# Altium PCB Biocoin_Motherboard.PcbDoc
Units mil, origin at the board's own origin, x right, y up, seen from the top; angles counter-clockwise.
Board outline 2100 x 2600 mil, 4 copper layers (Top Layer, GND, POWER, Bottom Layer), stack 63.78 mil thick; 71 components, 57 nets, 231 pads, 44 vias.
Unrouted connection lines stored in the file: 17.
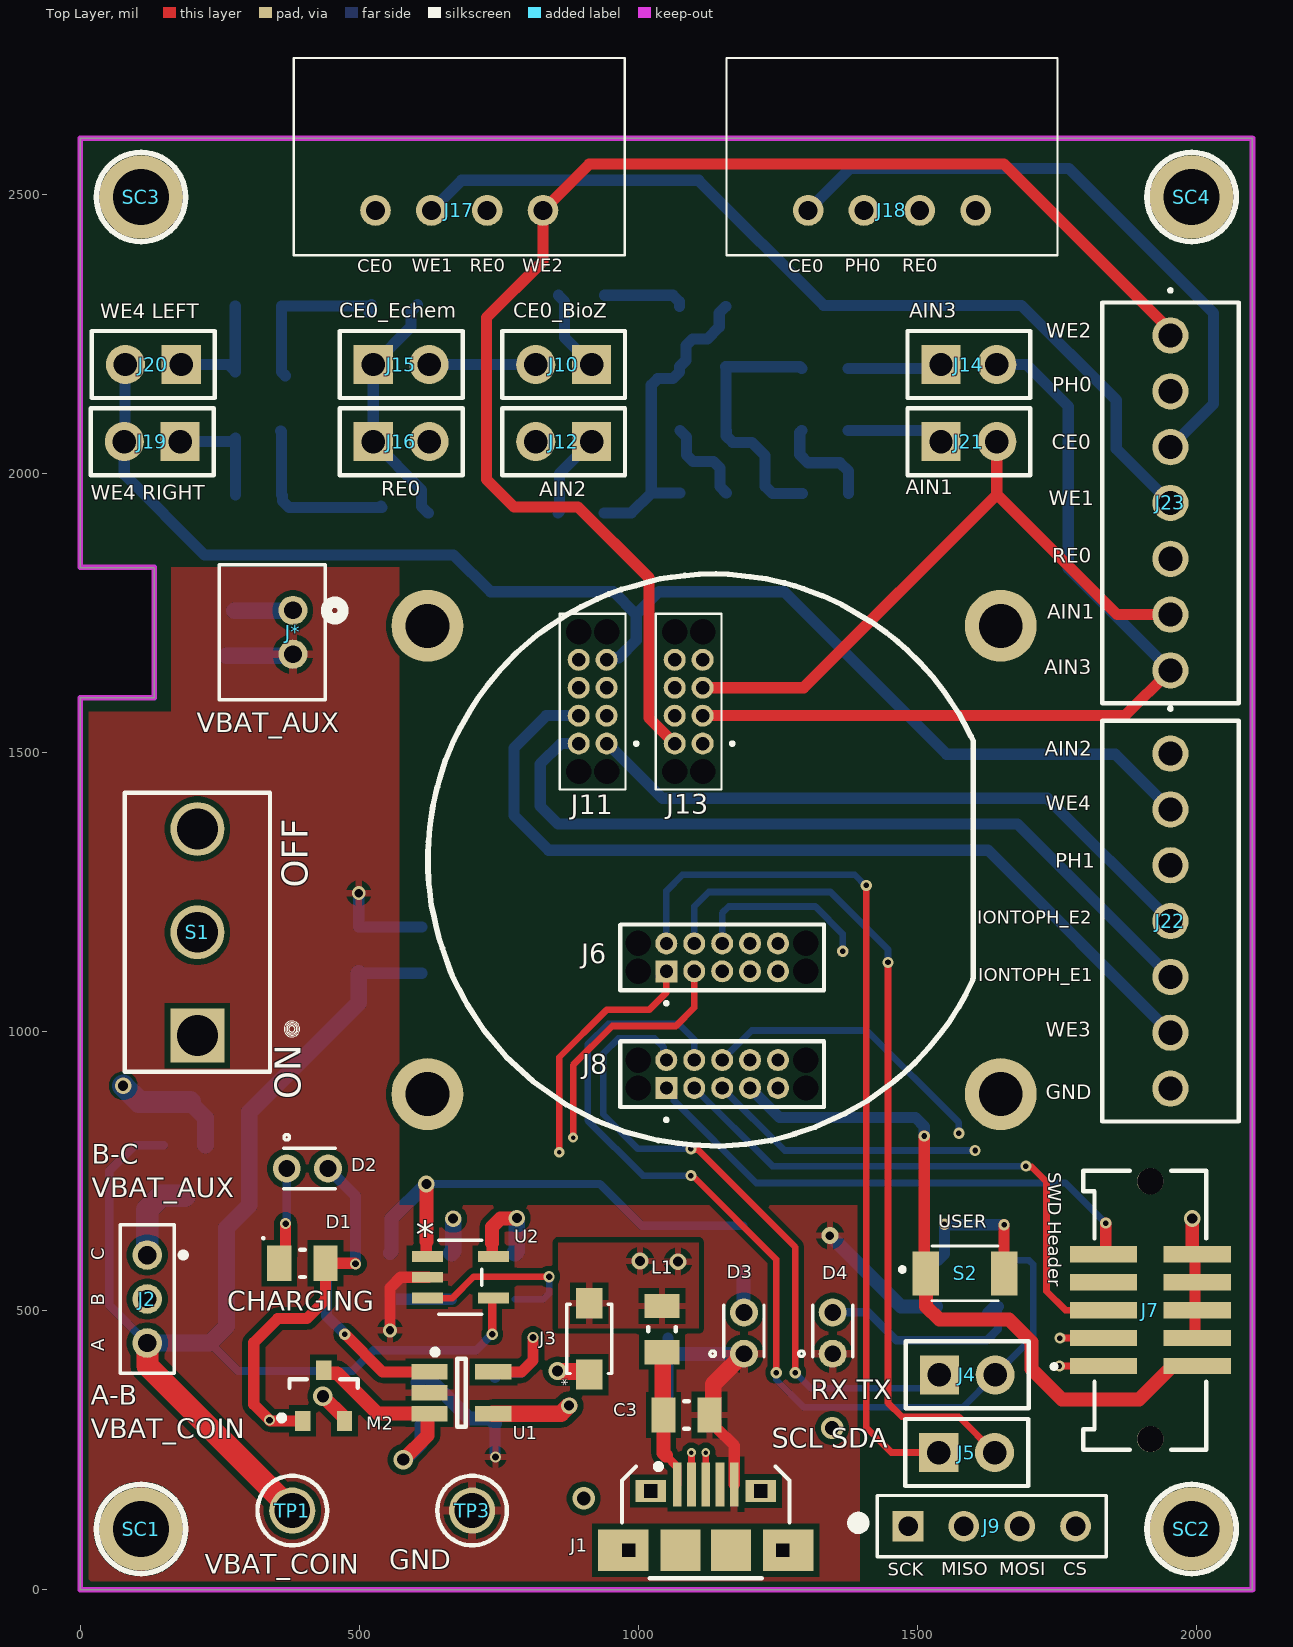
[diagram p0: Top Layer view]
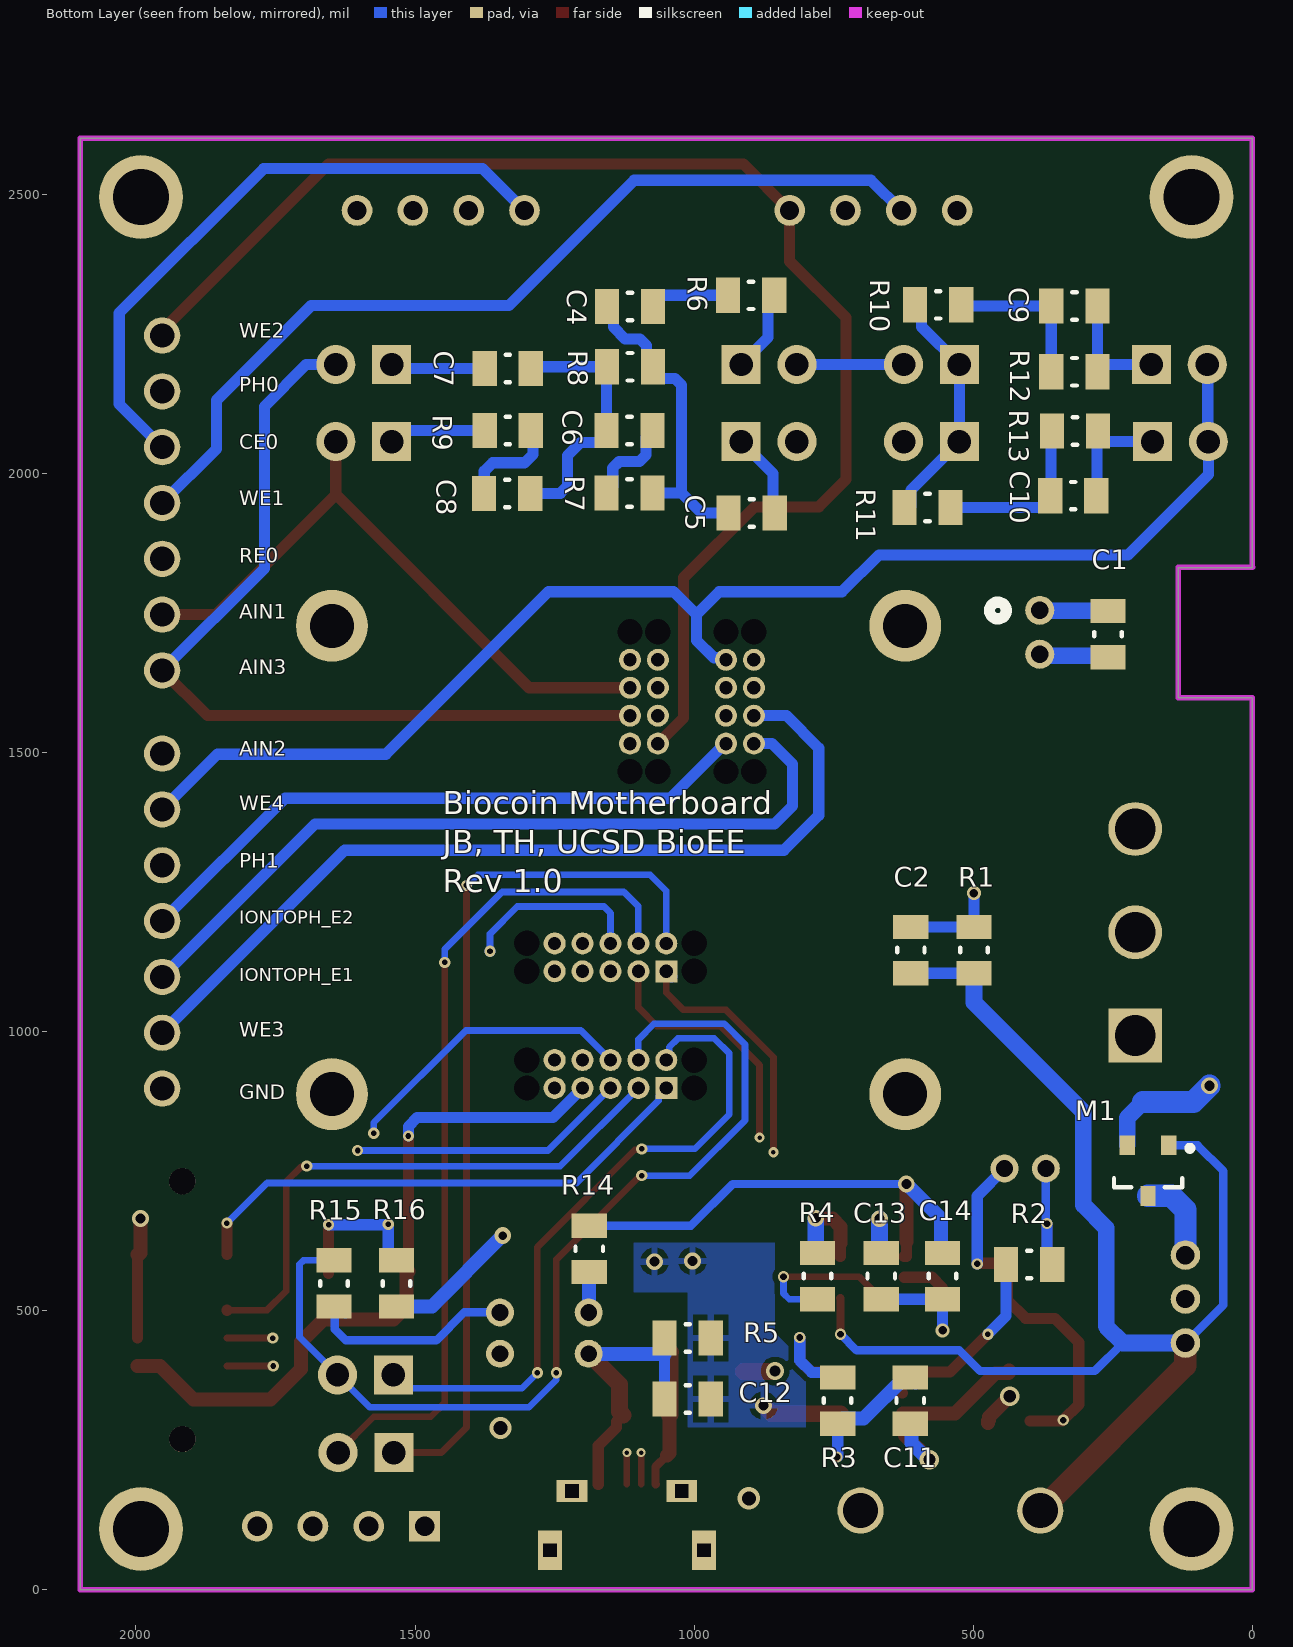
[diagram p1: Bottom Layer view, seen from below]
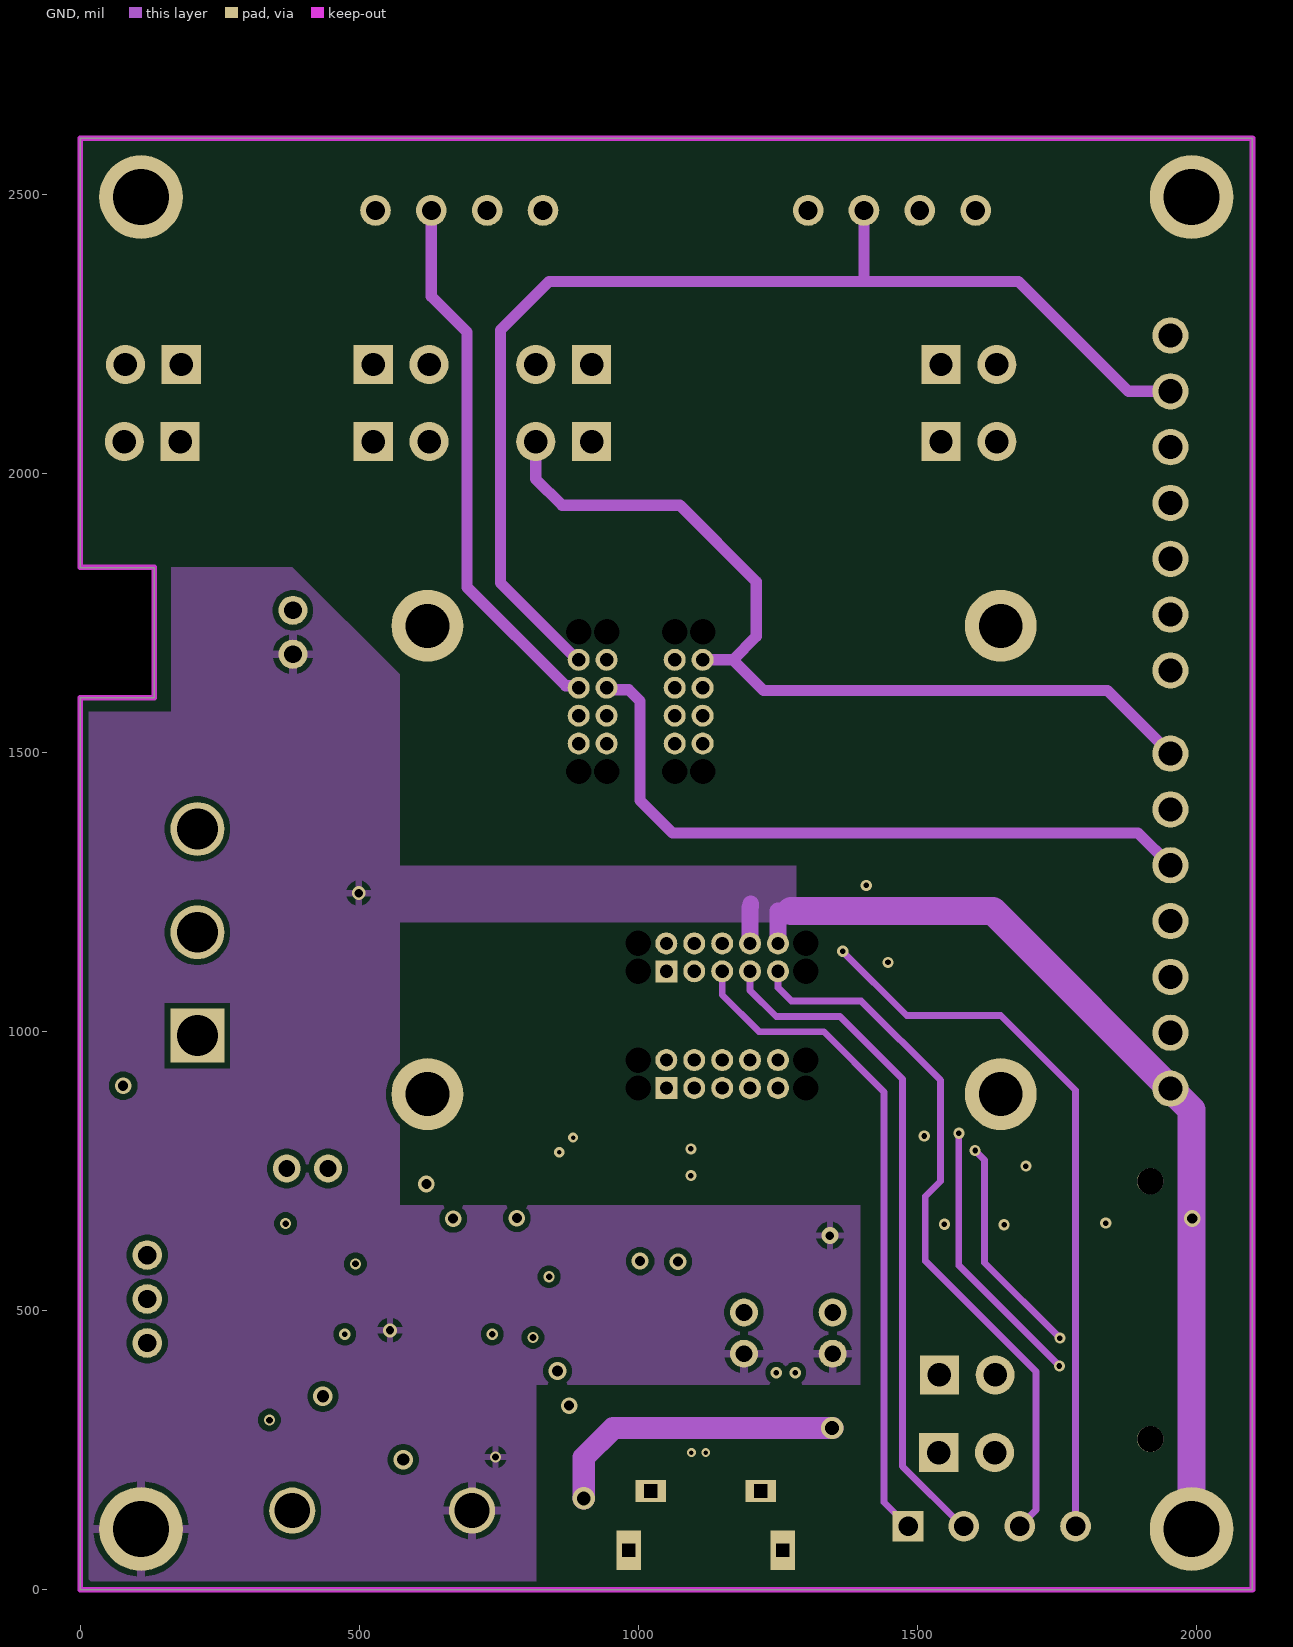
[diagram p2: GND]
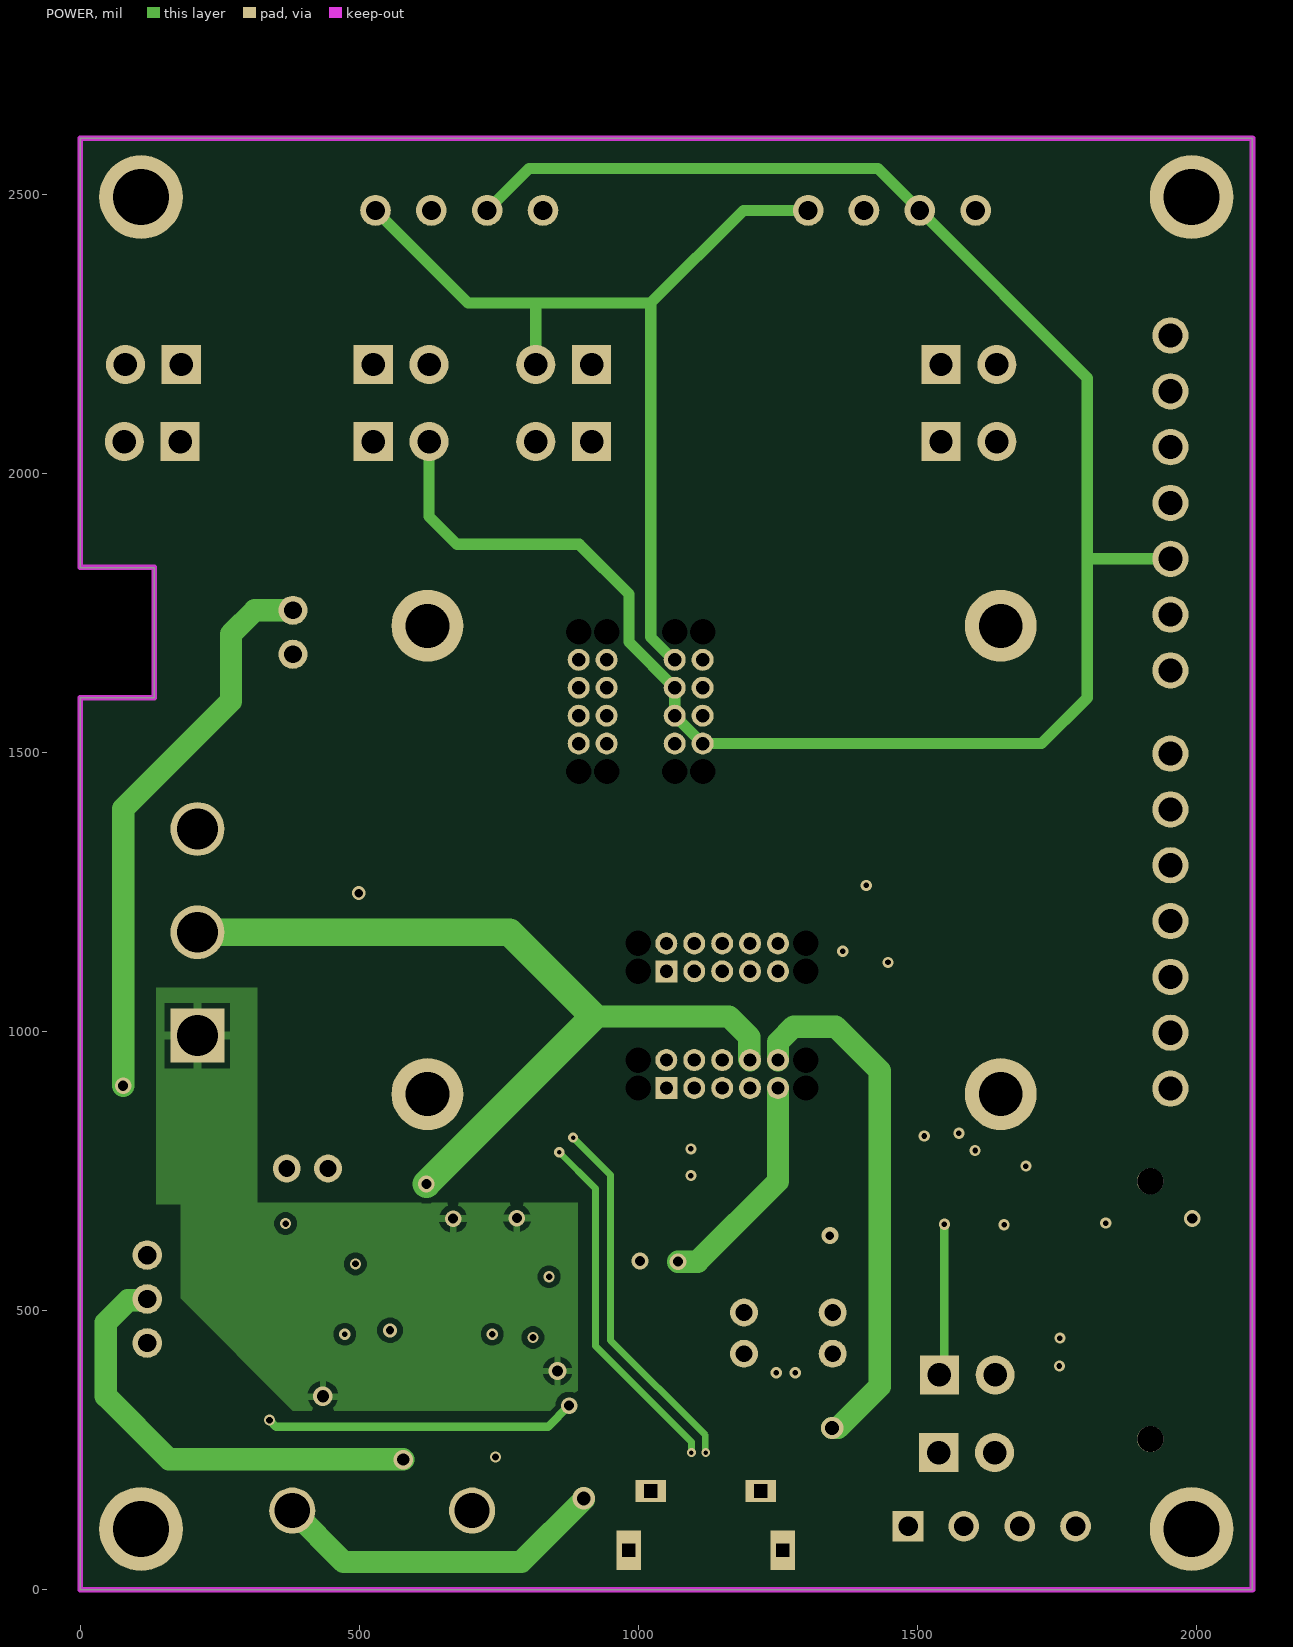
[diagram p3: POWER]
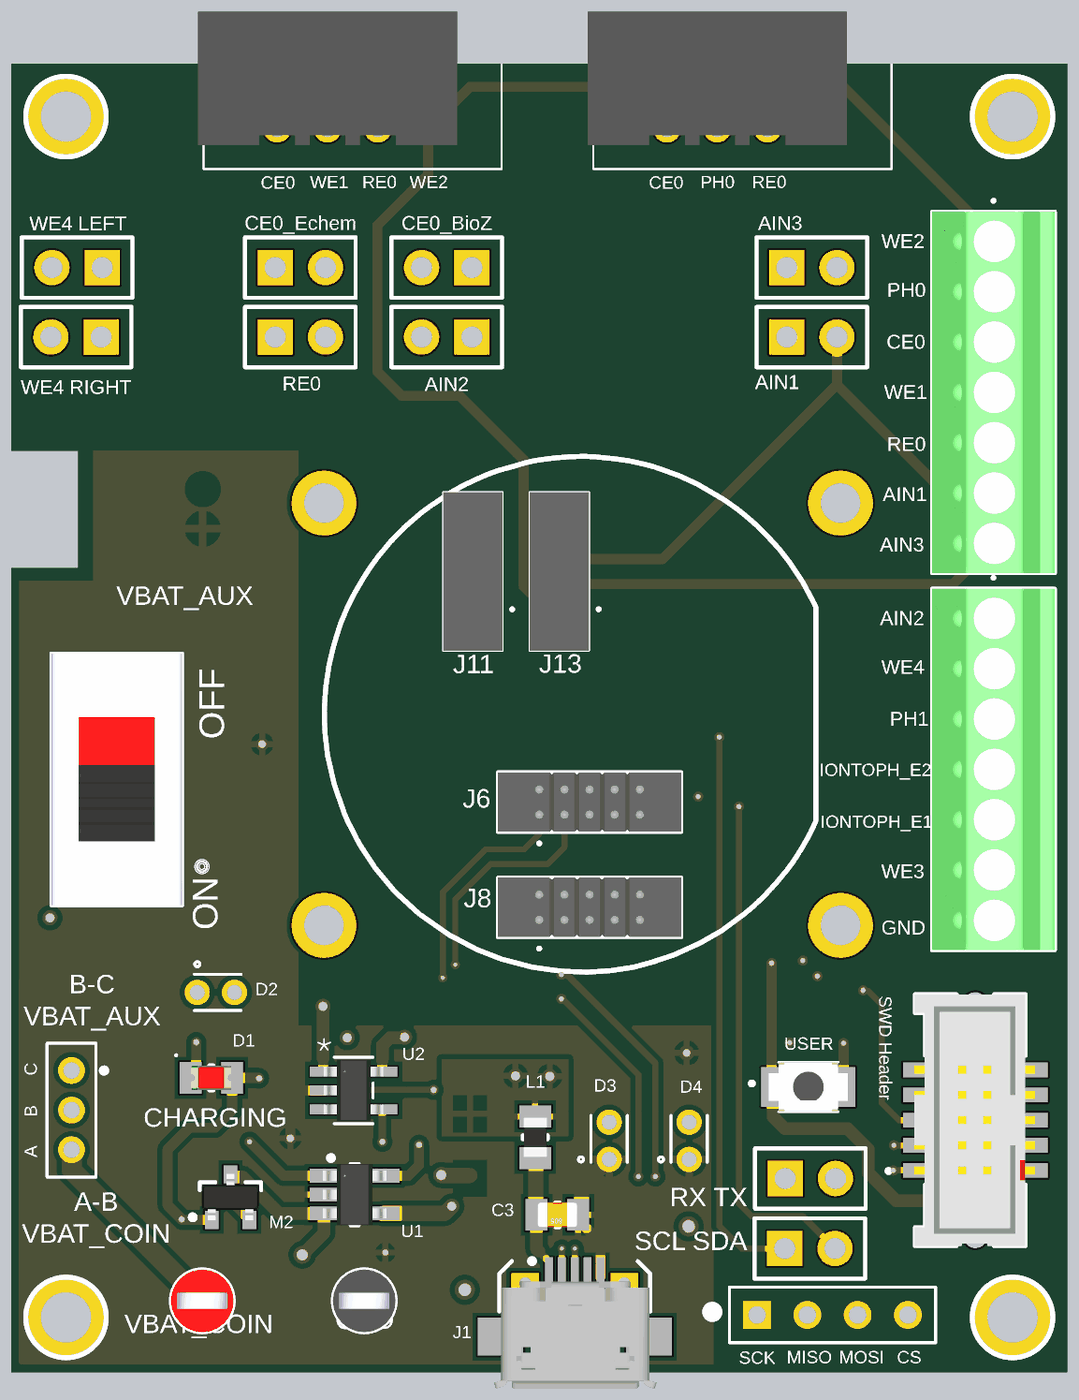
[diagram p4: 3D render of the assembled board from above, using the file's embedded part models]
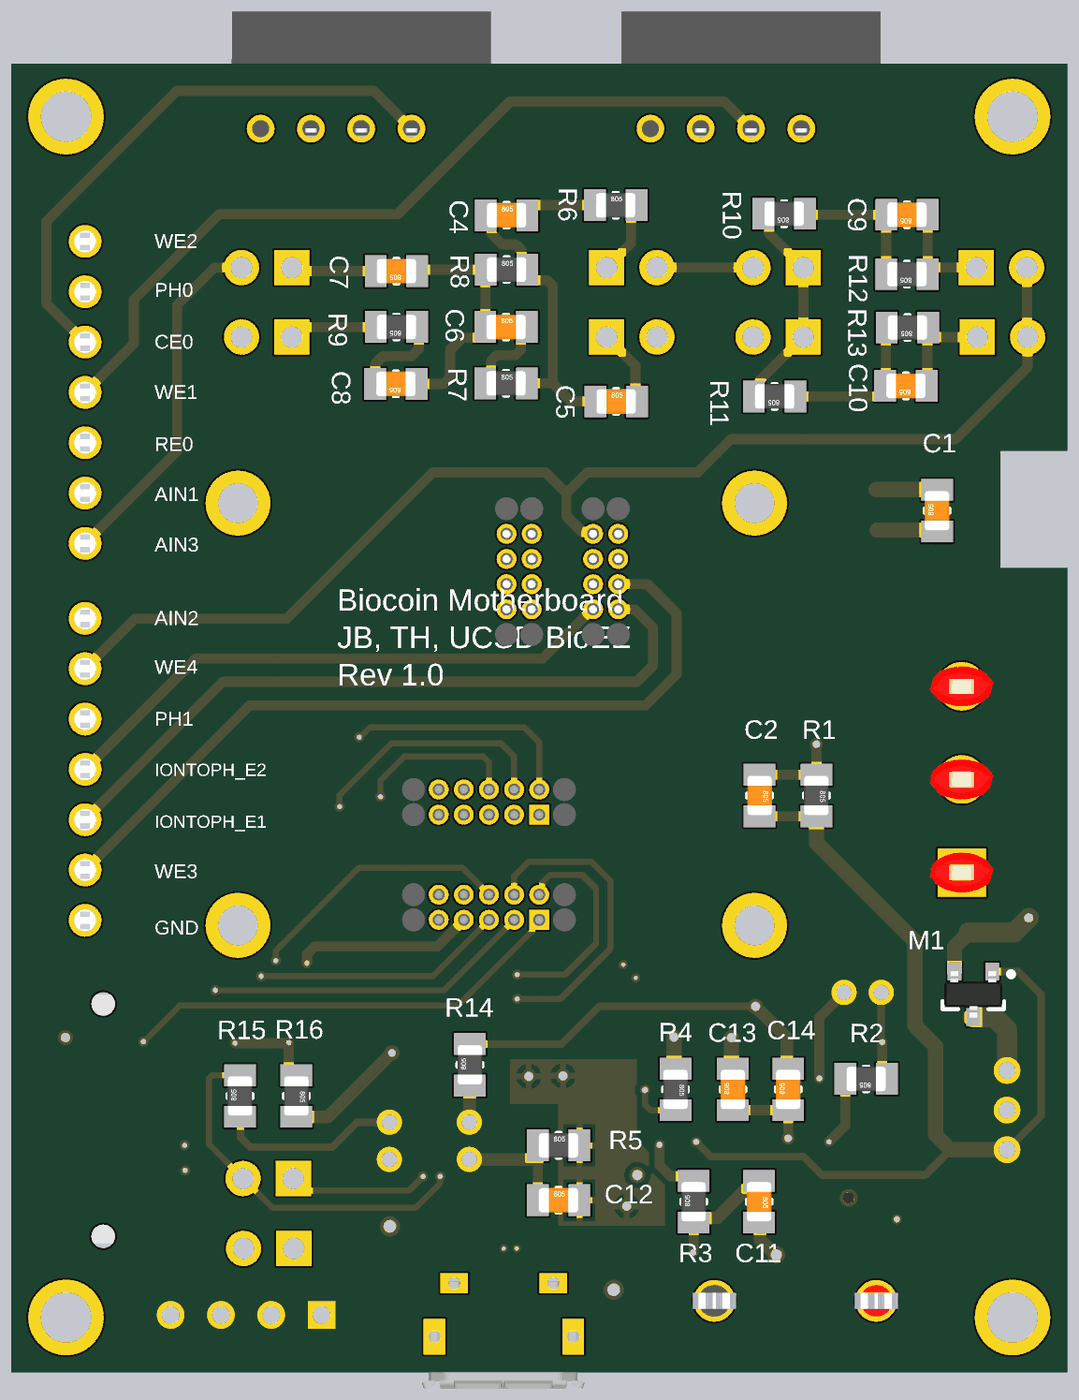
[diagram p5: 3D render of the assembled board from below, using the file's embedded part models]

## Layer stack, top to bottom
Top Solder: solder mask 0.4, Solder Resist, Dk 3.5
Top Layer: signal copper 1.378
Dielectric 2: prepreg 6.89, PP-006, Dk 4.2
GND: signal copper 1.378
Dielectric 1: dielectric 44.488, FR-4, Dk 4.2
POWER: signal copper 1.378
Dielectric 3: prepreg 6.89, PP-006, Dk 4.2
Bottom Layer: signal copper 1.378
Bottom Solder: solder mask 0.4, Solder Resist, Dk 3.5

## Board outline
0,1831 133,1831 133,1598 0,1598 0,0 2100,0 2100,2600 0,2600

## Design rules (kind name [scope] priority, off if disabled: settings)
Clearance [All] p1: gap=4 ignorepadtopadclearanceinfootprint=FALSE except(10: Arc-Fill Arc-Poly Arc-Region Track-Fill Track-Poly Track-Region SMDPad-Fill SMDPad-Poly SMDPad-Region THPad-Fill THPad-Poly THPad-Region Via-Fill Via-Poly Via-Region Fill-Fill Fill-Poly Fill-Region Poly-Poly Poly-Region Region-Region)
HoleToHoleClearance [All] p1: gap=4 allowstackedmicrovias=TRUE
MinimumSolderMaskSliver [All] p1: minsoldermaskwidth=0
PlaneConnect [All] p1: planeconnectstyle=Relief reliefexpansion=20 reliefentries=4 reliefconductorwidth=15 reliefairgap=10
PolygonConnect [All] p1: thpad.connectstyle=Relief thpad.reliefconductorwidth=15 thpad.reliefentries=4 thpad.polygonreliefangle="90 Angle" thpad.airgapwidth=10 smdpad.connectstyle=Relief smdpad.reliefconductorwidth=12 smdpad.reliefentries=4 smdpad.polygonreliefangle="90 Angle" smdpad.airgapwidth=10 via.connectstyle=Relief via.reliefconductorwidth=12 via.reliefentries=4 via.polygonreliefangle="90 Angle" via.airgapwidth=10
RoutingVias [All] p1: holewidth=15 width=30 viastyle="Through Hole" minholewidth=10 minwidth=10 maxholewidth=40 maxwidth=50
SilkToSilkClearance [All] p1: silktosilkclearance=0
SilkToSolderMaskClearance [IsPad] p1: minsilkscreentomaskgap=0 clearancetoexposedcopper=TRUE
SolderMaskExpansion [All] p1: expansion=4 istentingtop=FALSE
Width [All] p1: maxlimit=80 minlimit=5 preferedwidth=10
25 further rules are at their usual default settings.

## Classes and differential pairs
component class POWER: C1 C2 C3 C11 C12 C13 C14 D1 D2 D3 J1 J2 J3 J* L1 M1 M2 R1 R2 R3 R4 R5 R14 S1 SC1 SC2 SC3 SC4 TP1 TP3 U1 U2
component class DIGITAL_DATA: D4 J4 J5 J6 J7 J8 J9 R15 R16 S2
component class ANALOG_DATA: C4 C5 C6 C7 C8 C9 C10 J10 J11 J12 J13 J14 J15 J16 J17 J18 J19 J20 J21 J22 J23 R6 R7 R8 R9 R10 R11 R12 R13

## Components (designator, comment, footprint, x,y, rotation, side; value= is the part's Value field where it differs from the comment)
C1 "CAP" 0805-CAP 259,1712 r90 bottom value=10uF
C2 "CAP" 0805-CAP 612,1146 r270 bottom value=10uF
C3 "CAP" 0805-CAP 1086,313 r180 top value=10nF
C4 "CAP" 0805-CAP 1115,2299 r180 bottom value=15nF
C5 "CAP" 0805-CAP 897,1929 r180 bottom value="470 nF"
C6 "CAP" 0805-CAP 1116,2077 r180 bottom value=10uF
C7 "CAP" 0805-CAP 1334,2188 r0 bottom value="470 nF"
C8 "CAP" 0805-CAP 1335,1964 r0 bottom value="470 nF"
C9 "CAP" 0805-CAP 319,2300 r0 bottom value=10uF
C10 "CAP" 0805-CAP 321,1960 r0 bottom value=DNI
C11 "CAP" 0805-CAP 613,339 r270 bottom value=10uF
C12 "CAP" 0805-CAP 1011.69,342 r180 bottom value=10uF
C13 "CAP" 0805-CAP 665,562 r90 bottom value=100nF
C14 "CAP" 0805-CAP 555,562 r90 bottom value=100nF
D1 "LED SMD" 0805-LED 398,585 r180 top
D2 "SLI-343V8RC3F" LED_SLI-343D_ROM 460,754.82 r0 top
D3 "SLI-343V8RC3F" LED_SLI-343D_ROM 1189,513 r90 top
D4 "SLI-343V8RC3F" LED_SLI-343D_ROM 1348,513 r90 top
J1 "MicroUSB-B" MicroUSB-B 1120.59,70.89 r90 top
J2 "NRPN031PAEN-RC" CONN_NRPN031_SUL 120,599.74 r90 top
J3 "MBR120ESFT3G" SDO_SOD-123FL_ONS-L -1998,499.5 r90 top
J4 "Header 2x1" "Header 1x2" 1589,385 r0 top
J5 "Header 2x1" "Header 1x2" 1588,246 r0 top
J6 "855-22-010-10-001101" HDRV10W41P127_2X5_927X300X627P 1050,1108 r0 top
J7 "SHF-105-01-L-D-SM" SAMTEC_SHF-105-01-L-D-SM 1917,501 r90 top
J8 "855-22-010-10-001101" HDRV10W41P127_2X5_927X300X627P 1050,899 r0 top
J9 "61300411121" CONN_61300411121_WRE 1483,114 r0 top
J10 "Header 2x1" "Header 1x2" 866,2195 r180 top
J11 "855-22-008-10-001101" 8552200810001101 943,1516 r90 top
J12 "Header 2x1" "Header 1x2" 866,2057 r180 top
J13 "855-22-008-10-001101" 8552200810001101 1115,1516 r90 top
J14 "Header 2x1" "Header 1x2" 1592,2195 r0 top
J15 "Header 2x1" "Header 1x2" 575,2195 r0 top
J16 "Header 2x1" "Header 1x2" 575,2057 r0 top
J17 "DS1020-03RT1D" 55203144-2 680,2544 r180 top
J18 "DS1020-03RT1D" 55203144-2 1455,2544 r180 top
J19 "Header 2x1" "Header 1x2" 129,2057 r180 top
J20 "Header 2x1" "Header 1x2" 131,2195 r180 top
J21 "Header 2x1" "Header 1x2" 1592,2057 r0 top
J22 "1725708" 1725708 1953,1498 r270 top
J23 "1725708" 1725708 1953,2247 r270 top
J* "S2B-PH-K-S(LF)(SN)" CONN_S2B-PH-K-S_JST 4506,3029.74 r270 top
L1 "IND" 0805-IND 1042,467 r90 top value="Ferrite Bead"
M1 "DMG2305" SOT23-3-LEAD 187,751 r270 bottom
M2 "DMG2305" SOT23-3-LEAD 436,348 r90 top
R1 "RES" 0805-RES 499,1146 r270 bottom value=10M
R2 "RES" 0805-RES 400,583 r0 bottom value=470
R3 "RES" 0805-RES 743,339 r90 bottom value=20K
R4 "RES" 0805-RES 779,562 r270 bottom value=DNI
R5 "RES" 0805-RES 1011.69,451 r180 bottom value=100K
R6 "RES" 0805-RES 898,2319 r180 bottom value=1K
R7 "RES" 0805-RES 1116,1965 r180 bottom value=1M
R8 "RES" 0805-RES 1115,2191 r180 bottom value=2K
R9 "RES" 0805-RES 1334,2077 r0 bottom value=1K
R10 "RES" 0805-RES 563,2302 r0 bottom value=10K
R11 "RES" 0805-RES 582,1939 r0 bottom value=0
R12 "RES" 0805-RES 319,2182 r0 bottom value=1M
R13 "RES" 0805-RES 318,2076 r0 bottom value=10K
R14 "RES" 0805-RES 1188,611 r90 bottom value=DNI
R15 "RES" 0805-RES 1645,549 r90 bottom value=DNI
R16 "RES" 0805-RES 1533,549 r270 bottom value=DNI
S1 "1101M2S3CQE2" SW_1101M2S3CQE2 210,1178 r180 top
S2 "B3U-1000P" SW_B3U-1000P 1545,952 r0 top
SC1 "ScrewHole" ScrowHole 109,109 r0 top
SC2 "ScrewHole" ScrowHole 1991,109 r0 top
SC3 "ScrewHole" ScrowHole 109,2495 r0 top
SC4 "ScrewHole" ScrowHole 1991,2495 r0 top
TP1 "5010" KSTN-5010_V 400,552 r0 top
TP3 "5011" KSTN-5011_V 727,377 r0 top
U1 "MCP73831T-2ACI/OT" SOT23-5 683,353 r0 top
U2 "AP2171WG-7" SOT25_DIO-M 681,560 r0 top value=DNI

## Footprints (in the part's own frame and the unit in brackets; to place one, negate y for a bottom-side part, rotate by r counter-clockwise, add the part's x,y. Pads: shape width x height; smd on the part's side, far side on the other; paste and mask are expansions set on the pad)
0805-CAP [mm] "Chip Capacitor, 2-Leads, Body 2.00x1.25mm, IPC Low Density"
  rect 1.1x1.6 smd: 1(-1.05,0) 2(1.05,0)
  silkscreen extent -0.1,-0.62 0.1,0.63, body extent -1,-0.63 1,0.62, height 0.78
0805-IND [mm] "Chip Inductor, 2-Leads, Body 2.00x1.25mm, IPC Low Density"
  rect 1.1x1.6 smd: 1(-1.05,0) 2(1.05,0)
  silkscreen extent -0.1,-0.62 0.1,0.63, body extent -1,-0.6 1,0.6, height 0.95
0805-LED [mm] "Chip LED, 2-Leads, Body 2.00x1.25mm, IPC Low Density"
  rect 1.1x1.6 smd: 1(-1.05,0) 2(1.05,0)
  silkscreen extent -0.1,-1.19 1.83,0.63, body extent -1.01,-0.63 1.01,0.62, height 1.1
0805-RES [mm] "Chip Resistor, 2-Leads, Body 2.00x1.25mm, IPC Low Density"
  rect 1.1x1.6 smd: 1(-1.05,0) 2(1.05,0)
  silkscreen extent -0.1,-0.63 0.1,0.63, body extent -1,-0.63 1,0.62, height 0.78
1725708 [mm]
  round 1.65 hole 1.1: 1(0,0) 2(2.54,0) 3(5.08,0) 4(7.62,0) 5(10.16,0) 6(12.7,0) 7(15.24,0)
  silkscreen extent -2.1,-3.1 16.74,3.1, body extent -1.5,-3.1 16.74,3.1, height 8.5
55203144-2 [mil]
  round 55 hole 33.86: 1(-149,73) 2(-49,73) 3(51,73) 4(151,73)
  silkscreen extent -295,-200 297,153, body extent -206,-160 308,106, height 178
8552200810001101 [mm]
  round 1 hole 0.61: 1(0,0) 2(0,1.27) 3(1.27,0) 4(1.27,1.27) 5(2.54,0) 6(2.54,1.27) 7(3.81,0) 8(3.81,1.27)
  round 0.62 hole 1.156 unplated: MH1(-1.27,0) MH2(-1.27,1.27) MH3(5.08,0) MH4(5.08,1.27)
  silkscreen extent -2.09,-1.4 5.91,2.13, body extent -2.09,-0.86 5.91,2.13, height 6.37
CONN_61300411121_WRE [mil]
  rect 55x55 hole 35 mask+0: 1(0,0)
  round 55 hole 35 mask+0: 2(100,0) 3(200,0) 4(300,0)
  silkscreen extent -99,-55 355,55, body extent 0,0 10,10, height 10
CONN_NRPN031_SUL [mil]
  round 53 hole 33 mask+0: 1(0,0) 2(-78.74,0) 3(-157.48,0)
  silkscreen extent -212,-65 54,48
CONN_S2B-PH-K-S_JST [mil]
  round 52 hole 32 mask+0: 1(1275,-4125) 2(1353.74,-4125)
  silkscreen extent 1193,-4257 1435,-4035, body extent 1199,-4372 1431,-4073, height 189
HDRV10W41P127_2X5_927X300X627P [mm]
  rect 1x1 hole 0.6: 1(0,0)
  round 1 hole 0.6: 2(0,1.27) 3(1.27,0) 4(1.27,1.27) 5(2.54,0) 6(2.54,1.27) 7(3.81,0) 8(3.81,1.27) 9(5.08,0) 10(5.08,1.27)
  round 0.62 hole 1.156 unplated: MH1(-1.27,0) MH2(-1.27,1.27) MH3(6.35,0) MH4(6.35,1.27)
  silkscreen extent -2.1,-1.5 7.17,2.13, body extent -2.1,-0.86 7.18,2.13, height 6.27
"Header 1x2" [mil] "2-Pin, 1 Row, 2 Column Header"
  rect 70x70 hole 42: 1(-50,0)
  round 70 hole 42: 2(50,0)
  silkscreen extent -110,-60 110,60
KSTN-5010_V [mm]
  round 2.1 hole 1.6: 1(-0.508,-10.414)
  silkscreen extent -2.09,-12 1.08,-8.83, body extent -2.1,-12 1.08,-8.83, height 8.13
KSTN-5011_V [mm]
  round 2.1 hole 1.6: 1(-0.635,-5.969)
  silkscreen extent -2.22,-7.55 0.95,-4.39, body extent -2.22,-7.56 0.95,-4.38, height 8.13
LED_SLI-343D_ROM [mil]
  round 50 hole 30 mask+0: 1(-90,0) 2(-16,0)
  silkscreen extent -96,-36 -3,61
MicroUSB-B [mm] "Conn Micro USB Type B RCP 5"
  rect 1.9x2.3 smd: 0(0,3.75) 0(0,-3.75)
  rect 1.8x1.1 hole 0.6 square: 0(0,3.505) 0(0,-3.5)
  rect 1.9x1.8 smd: 0(0,1.15) 0(0,-1.15)
  rect 1x1.4 hole 0.6 square: 0(2.7,-2.5) 0(2.7,2.5)
  rect 2x0.4 smd: 1(3,1.3) 2(3,0.65) 3(3,0) 4(3,-0.65) 5(3,-1.3)
  silkscreen extent -1.27,-3.81 3.93,3.81, body extent -2.62,-4.13 2.78,4.07, height 2.71
SAMTEC_SHF-105-01-L-D-SM [mm]
  rect 0.74x3.049 smd: 01(-2.54,2.134) 02(-2.54,-2.134) 03(-1.27,2.134) 04(-1.27,-2.134) 05(0,2.134) 06(0,-2.134) 07(1.27,2.134) 08(1.27,-2.134) 09(2.54,2.134) 10(2.54,-2.134)
  round 1.19 hole 1.19 unplated: ""(-5.867,0) ""(5.867,0)
  silkscreen extent -6.35,-2.54 6.35,4.48, body extent -6.35,-3.02 6.35,3.07, height 5.35
ScrowHole [mil] "Hole for Scrows"
  round 150 hole 100: 1(0,0)
  silkscreen extent -80,-80 80,80
SDO_SOD-123FL_ONS-L [mil]
  rect 54x48 smd paste+0 mask+4: 1(-114,-2910) 2(14,-2910)
  silkscreen extent -112,-2950 12,-2870, body extent -125,-2946 25,-2874, height 39
SOT23-3-LEAD [mm] "SOT23, 3-Leads, Body 2.92x2.40mm, Pitch 0.95mm, IPC Low Density"
  rect 0.9x0.7 smd: 1(-1.15,0.95) 2(1.15,0) 3(-1.15,-0.95)
  silkscreen extent -1.14,-1.55 0.75,2.03, body extent -1.17,-1.46 1.17,1.46, height 1
SOT23-5 [mm] "SOT23, 5-Leads, Body 2.90x2.80mm, Pitch 0.95mm, IPC Low Density"
  rect 1.652x0.7 smd: 1(-1.451,0.95) 2(-1.451,0) 3(-1.451,-0.95) 4(1.451,-0.95) 5(1.451,0.95)
  silkscreen extent -1.32,-1.55 0.2,1.97, body extent -1.6,-1.55 1.6,1.55, height 1.45
SOT25_DIO-M [mm]
  rect 1.412x0.5 smd paste+0 mask+0.076: 1(-1.505,0.95) 2(-1.505,0) 3(-1.505,-0.95) 4(1.505,-0.95) 5(1.505,0.95)
  silkscreen extent -0.98,-1.68 0.98,1.68, body extent -1.5,-1.55 1.5,1.55, height 1.45
SW_1101M2S3CQE2 [mm]
  rect 2.45x2.45 hole 1.85: 1(0,4.7)
  round 2.45 hole 1.85: 2(0,0) 3(0,-4.7)
  silkscreen extent -4.66,-6.35 3.3,6.35, body extent -3.3,-6.35 3.3,6.35, height 11.44
SW_B3U-1000P [mil]
  rect 47.24x78.74 smd: 1(-30,-385) 2(110,-385)
  silkscreen extent -76,-434 99,-336, body extent -39,-434 119,-336, height 69

## Part data
C1 C2 C3 C4 C5 C6 C7 C8 C9 C10 C11 C12 C13 C14: library part "CAP SMD", "Multilayer Chip Capacitor", Designer=OMIGA
D1: "Surface Mount Light Emitting Diode", Light Color=Orange
D2 D3 D4: "No Description Available", Built_By=EMA_Matt, Copyright="Copyright (C) 2018 Accelerated Designs. All rights reserved", Do Not Install=DNI, Manufacturer_Part_Number=SLI-343V8RC3F, SourceLibrary=Rohm_2019-09-23, Vendor="ROHM Semiconductor"
J1: "Conn Micro USB Type B RCP 5", Designer=OMIGA
J2: "No Description Available", Mfr_Name=Sullins, Copyright="Copyright (C) 2022 Ultra Librarian. All rights reserved.", Digi-Key_Part_Number_1=S5800-03-ND, Manufacturer_Part_Number=NRPN031PAEN-RC, RefDes=RefDes, Type=DEV
J3: library part SCHOTTKY, "Diode Schottky 1A Surface Mount SOD-123FL"
J4 J5 J10 J12 J14 J15 J16 J19 J20 J21: "Pin Header 2x1", Designer=OMIGA
J6 J8: library part "10 pin Pogo Pin Male Header", Manufacturer_Name=Mill-Max, Datasheet Link=https://www.mill-max.com/products/socket/855-XX-XXX-10-001101/855-22-010-10-001101, Height=6.274mm, Manufacturer_Part_Number=855-22-010-10-001101
J7: "SHF - Samtec Wire-to-Board 1.27mm Surface Mount Shrouded Header", Package=None, Check_prices=https://www.snapeda.com/parts/SHF-105-01-L-D-SM/Samtec+Inc./view-part/?ref=eda, Digi-Key_Part_Number=SAM10710-ND, MF=Samtec, MP=SHF-105-01-L-D-SM, Purchase-URL=https://pricing.snapeda.com/search/part/SHF-105-01-L-D-SM/?ref=eda, SnapEDA_Link=https://www.snapeda.com/parts/SHF-105-01-L-D-SM/Samtec+Inc./view-part/?ref=snap
J9: library part "Header 4x1", "CONN HEADER VERT 4POS 2.54MM"
J11 J13: library part "8 pin Pogo Pin Male Header", Manufacturer_Name=Mill-Max, Datasheet Link=https://componentsearchengine.com/Datasheets/2/855-22-008-10-001101.pdf, Height=6.27mm, Manufacturer_Part_Number=855-22-008-10-001101
J17 J18: library part "SPE Connector 3 pin", "3 pin right angle SPE connector. Can also use the 5-520315-3-ND"
J22 J23: "Connector", Manufacturer_Name="Phoenix Contact", Datasheet Link=https://www.phoenixcontact.com/online/portal/us/?uri=pxc-oc-itemdetail:pid=1725708&library=usen&pcck=P-11-01-05&tab=1&selectedCategory=ALL, Height=8.65mm, Manufacturer_Part_Number=1725708
J*: "Connector Header Through Hole, Right Angle 2 position 0.079\" (2.00mm)"
L1: library part "IND SMD", "Surface Mount Inductor", Designer=OMIGA
M1 M2: library part PMOS, "P-Channel MOSFET DMG2305UX-13", Designer=OMIGA
R1 R2 R3 R4 R5 R6 R7 R8 R9 R10 R11 R12 R13 R14 R15 R16: library part "RES SMD", "Surface Mount Resistor", Designer=OMIGA
S1: "Slide Switch SPDT Through Hole", Package=None, Digi-Key_Part_Number=CKN5001-ND, Digi-Key_Purchase_URL=https://www.digikey.fr/product-detail/en/c-k/1101M2S3CQE2/CKN5001-ND/67042?utm_source=snapeda&utm_medium=aggregator&utm_campaign=symbol, MF=C&K, MP=1101M2S3CQE2, SnapEDA_Link=https://www.snapeda.com/parts/1101M2S3CQE2/C%26K/view-part/287375/?ref=snap
S2: library part "Pushbutton Small", "SWITCH TACTILE SPST-NO 0.05A 12V", Do Not Install=DNI
SC1 SC2 SC3 SC4: "Scrow Hole", Designer=OMIGA
TP1: library part "Test Point Red", "PC TEST POINT MULTIPURPOSE RED"
TP3: library part "Test Point Black", "PC TEST POINT MULTIPURPOSE BLACK"
U1: "Charger IC Lithium Ion/Polymer SOT-23-5"
U2: "No Description Available", Mfr_Name="Diodes Inc", Copyright="Copyright (C) 2022 Ultra Librarian. All rights reserved.", Digi-Key_Part_Number_1=AP2171WGDICT-ND, Digi-Key_Part_Number_2=AP2171WGDIDKR-ND, Digi-Key_Part_Number_3=AP2171WGDITR-ND, Manufacturer_Part_Number=AP2171WG-7, RefDes=RefDes, Type=DEV

## Free pads (board coordinates)
  round 128.74 hole 78.74: 1(622,888) 1(622,1727) 1(1649,888) 1(1649,1727)

## Via types
v1: diameter 20, hole 10, Top Layer to Bottom Layer, tented both sides, 17 vias
v2: diameter 30, hole 18, Top Layer to Bottom Layer, tented both sides, 8 vias
v3: diameter 20, hole 12, Top Layer to Bottom Layer, tented both sides, 7 vias
v4: diameter 35, hole 22, Top Layer to Bottom Layer, tented both sides, 2 vias
v5: diameter 40, hole 25, Top Layer to Bottom Layer, tented both sides, 2 vias
v6: diameter 18, hole 8, Top Layer to Bottom Layer, tented both sides, 2 vias
v7: diameter 16, hole 8, Top Layer to Bottom Layer, tented both sides, 2 vias
v8: diameter 25, hole 15, Top Layer to Bottom Layer, tented both sides, 2 vias
v9: diameter 32, hole 20, Top Layer to Bottom Layer, tented both sides, 1 vias
v10: diameter 30, hole 15, Top Layer to Bottom Layer, tented both sides, 1 vias

## Nets (pads, with @x,y where several pads share a name; then routed paths per layer and width w, separated by ;. In a path a pad name is that pad's centre, name@x,y a point inside that pad or via, vN(x,y) a via of type N, cw(c..) or ccw(c..) an arc to the next point about the centre after c; other vN are vias at no path point)
AIN1: J13.5 J21.2 J23.6 | length 1165.4
  Top Layer w20: J13.5 1296,1616 1642,1962 ; J21.2 1642,1962 ; J23.6 1857,1747 1642,1962
AIN2: J12.2 J13.7 J22.1 | length 1626.7
  Top Layer w20: J12.2 J12.2@825.97,2057
  GND w20: J12.2 816,1990 863,1943 1074,1943 1211,1806 1211,1708 1169,1666 ; J13.7 1169,1666 ; J22.1 1840,1611 1224,1611 1169,1666
  Bottom Layer w20: J12.2@816,2043.47 J12.2
AIN3: J13.3 J14.2 J23.7 | length 1579.4
  Top Layer w20: J13.3 1872,1566 J23.7
  Bottom Layer w20: J14.2 1695,2195 1770,2120 1770,1830 J23.7
CE0: J10.2 J13.8 J15.2 J17.4 J18.4 J23.3 | length 3007.7
  POWER w20: J17.4 695,2305 816,2305 ; J10.2 816,2305 ; J13.8 1063.03,1666 1022,1707.03 1022,2305 ; J18.4 1188,2471 1022,2305 ; 816,2305 1022,2305
  Bottom Layer w20: J15.2 J10.2 ; J18.4 1379,2546 1771,2546 2030,2287 2030,2124 J23.3
GND: C1.1 C2.1 C3.1 C11.1 C12.1 C13.1 C14.1 D3.1 D4.1 J1.5 J6.8 J6.10 J7.04 J7.06 J7.08 J7.10 J22.7 J*.2 R1.1 R3.1 R5.1 R16.2 SC1.1 SC2.1 TP3.1 U1.2 U2.2 | length 3581.6
  Top Layer w20: v8(555,465) 555,541 574,560 U2.2@623.74,560 ; U1.2@627.38,352.5 U1.2@627.88,353 ; C3.1 1138.99,301.34 1138.99,291.01 1171.77,258.23 J1.5 ; J7.04@1997.02,451 J7.10@1997.02,601
  Top Layer w25: v2(1992.06,665.14) 1992.06,603.07 1994.13,601 J7.10@1997.02,601
  Top Layer w30: C3.1 1133.99,319.65 1133.99,367.99 D3.1
  GND w30: J6.8 1200,1223 1201,1224 1201,1229 ; J6.10 1250,1216
  GND w40: SC1.1 SC1.1@109,113.29
  GND w50: 1273,1216 1635,1216 1991,860 SC2.1
  Bottom Layer w10: C13.1@664,519.66 C13.1
  Bottom Layer w20: v8(499,1248) R1.1 C2.1 ; v8(555,465) C14.1 C13.1 ; R3.1 743,239 v3(744,238) ; C12.1 R5.1
  Bottom Layer w25: C11.1@603.84,371.18 C11.1 622.84,380.34 696.36,306.82 733.85,306.82 R3.1 ; R5.1@1053.34,422 1053.84,422.5 1188.5,422.5 D3.1 ; v10(1343,634.62) 1469.95,507.66 R16.2
  Bottom Layer w30: C1.1@261.67,1673.33 J*.2@378.33,1673.33
IONTOPH_E1: J11.2 J22.5 | length 1415.1
  Bottom Layer w20: J11.2 861,1516 824,1479 824,1404 856,1372 1679,1372 J22.5
IONTOPH_E2: J11.1 J22.4 | length 1141.7
  Bottom Layer w20: J11.1 944.97,1516 1042.97,1418 1733,1418 J22.4
MCU_RESET: J7.09 J8.1 | length 948.5
  Top Layer w20: J7.09@1836.98,601 v1(1837,657)
  Bottom Layer w12: J8.1 1063.69,885.31 1063.69,876.31 1211,729 1765,729 v1(1837,657)
MCU_UART_RX: J4.1 J8.2 R16.1 S2.2 | length 1746.6
  Top Layer w12: v1(1094,790) 1095.53,788.47 1106.53,788.47 1281,614 v1(1281,389)
  Top Layer w20: S2.2 v1(1655,654)
  POWER w15: J4.1 1548,394 v1@1548,653.65
  Bottom Layer w12: J8.2 1044.76,954.24 1044.76,972.24 1029,988 964,988 937,961 937,852 999,790 v1(1094,790) ; v1(1281,389) 1309,361 1515,361 J4.1
  Bottom Layer w20: R16.1 1536.35,590.34 1548,601.99 v1(1548,655) 1549,654 v1(1655,654)
MCU_UART_TX: J4.2 J8.4 R15.2 | length 1772.6
  Top Layer w12: v1(1094,742) v1@1096,740 ; v1@1099,740 1246.97,592.03 v1(1246.97,389)
  Bottom Layer w12: v1(1094,742) 1008,742 909,841 909,977 946,1014 1072,1014 1100,986 J8.4 ; v1(1246.97,389) 1246.97,376.32 1296.29,327 1581,327 J4.2 1707,453 1707,583.31 1699.97,590.34 R15.2
NetC3_2: C3.2 J1.1 L1.1 | length 248.5
  Top Layer w15: 1049,240.91 1069.41,220.5 J1.1 J1.1@1069.04,189.37
  Top Layer w25: C3.2 1044.66,245.24 1049,240.91
  Top Layer w30: L1.1 1043.33,424.33 1043.33,314.33 C3.2
NetC4_1: C4.1 C5.1 R7.2 R8.2 | length 572.1
  Bottom Layer w20: C5.1 987,1929 1023,1965 ; R7.2 1023,1965 ; C4.1 1144.69,2287.35 1144.69,2262.02 1123.66,2241 1097.03,2241 1085.31,2229.28 1085.31,2202.65 R8.2 1073.66,2181.65 1062.01,2170 1034.72,2170 1023,2158.28 1023,1965
NetC4_2: C4.2 R6.1 | length 147.5
  Bottom Layer w20: R6.1 1062.01,2319 1073.66,2307.35 C4.2
NetC5_2: C5.2 J12.1 | length 153
  Bottom Layer w20: C5.2 858.78,1932.13 858.78,1999.78 J12.1
NetC6_1: C6.1 C7.1 C8.1 R8.1 | length 473.1
  Bottom Layer w20: C7.1 1289.66,2191 R8.1 1156.84,2190.5 1156.84,2077.5 C6.1 1157.34,2067.16 1168.99,2055.51 1203.49,2055.51 1227,2032 1227,1977 1240,1964 C8.1
NetC6_2: C6.2 R7.1 | length 167.5
  Bottom Layer w20: C6.2 1086.31,2065.35 1086.31,2032.72 1098.03,2021 1134.28,2021 1146,2009.28 1146,1976.34 R7.1
NetC7_2: C7.2 J14.1 | length 169.6
  Bottom Layer w20: C7.2 1535,2188 J14.1
NetC8_2: C8.2 R9.1 | length 184.1
  Bottom Layer w20: R9.1 1289,2073.34 1289,2034 1304,2019 1361,2019 1376,2004 1376,1964.34 C8.2
NetC9_1: C9.1 J20.1 R12.1 | length 219.5
  Bottom Layer w20: J20.1 266.01,2195 R12.1@277.66,2183.35 ; R12.1 R12.1@277.66,2183.35 ; C9.1 R12.1@277.66,2183.35
NetC9_2: C9.2 R10.1 R12.2 | length 305.8
  Bottom Layer w20: R12.2@367.34,2175 R12.2 C9.2 519.66,2300 R10.1 521.66,2292.16 R10.1@517.5,2288
NetC10_1: C10.1 J19.1 R13.1 | length 210.9
  Bottom Layer w20: J19.1@179,2048 J19.1@184.5,2053.5 ; J19.1 272.16,2057 278.16,2063 C10.1@278.16,1961.5
NetC10_2: C10.2 R11.1 R13.2 | length 312.6
  Bottom Layer w20: R13.2 360.84,2074.5 360.84,1961.5 C10.2 362.34,1950.65 373.99,1939 R11.1 R11.1@538.66,1941
NetC11_2: C11.2 J2.2 M2.2 U1.3 | length 1209.2
  Top Layer w25: M2.2 436,389.34 437.28,388.06 459.94,388.06 532.4,315.6 U1.3@623.28,315.6 ; v4(578.69,233.42) 622,276.73 622,314.32 U1.3@623.28,315.6 ; U1.3 U1.3@623.28,315.6
  POWER w40: J2.2 117.51,518.51 85.51,518.51 46,479 46,347 159,234 578.12,234 v4(578.69,233.42)
  Bottom Layer w25: v4@578.4,233.72 v4(578.69,233.42) 581.4,233.42 610.97,263 610.97,295.64 C11.2 C11.2@613.46,297.2
NetC13_2: C13.2 J3.1 M2.3 R4.1 S1.1 U2.5 | length 356.6
  Top Layer w10: U2.5@738.26,597.4 U2.5@739.94,599.09
  Top Layer w20: 738,621 738,597.56 738.16,597.4 U2.5@738.26,597.4
  Top Layer w25: v4(434.8,346.6) 472.12,309.28 472.12,304 M2.3 M2.3@473.4,298.79 ; 738,621 738,650.23 752.64,664.87 781.21,664.87 v2(782.17,665.83)
  Top Layer w30: v9(855,392) 856,391 J3.1@912,391
  Bottom Layer w10: C13.2@663.03,605.31 C13.2
  Bottom Layer w30: C13.2 668.17,606.5 v2(668.17,664.83) ; R4.1 782.17,606.5 v2(782.17,665.83)
NetD1_2: D1.2 D2.1 R2.1 | length 255
  Top Layer w10: v3(368,656) v3@369,657 ; D2.1@369,753.82 D2.1
  Top Layer w20: D1.2 368,596.34 v3(368,656)
  Bottom Layer w15: v3(368,656) 368,657.35 370,659.35 D2.1
  Bottom Layer w20: R2.1 368,592.34 v3(368,656)
NetD3_2: D3.2 R14.1 | length 73.1
  Bottom Layer w25: R14.1 1188.5,569.16 1188.5,497.5 D3.2
NetD4_2: D4.2 R15.1 | length 390.9
  Bottom Layer w15: D4.2 1412,497 1462,447 1624,447 1644,467 1644,506.66 R15.1
  Bottom Layer w20: R15.1@1625,496.01 1636.65,507.66 R15.1
NetJ2_1: J2.1 M1.2 | length 158.3
  Bottom Layer w40: J2.1 120,680.72 145.01,705.72 M1.2
NetJ10_1: J10.1 R6.2 | length 148.6
  Bottom Layer w20: R6.2 867.62,2308.04 867.62,2243.38 J10.1
NetJ15_1: J15.1 J16.1 R10.2 R11.2 | length 449.3
  Bottom Layer w20: J16.1@523,2057 J16.1@525,2059 ; R10.2 592.68,2290.35 592.68,2262.69 J15.1 J16.1@525,2059 ; R11.2@623.34,1929.16 611.68,1940.81 611.68,1970.31 J16.1 J16.1@525,2059
NetJ21_1: J21.1 R9.2 | length 174.9
  Bottom Layer w20: R9.2 1522,2077 J21.1
NetR2_2: R2.2 U1.1 | length 320.4
  Top Layer w20: v1(474,458) 541.6,390.4 U1.1@627.88,390.4
  Bottom Layer w20: R2.2 441.34,490.66 v1(474,458)
NetR3_2: R3.2 U1.5 | length 244
  Top Layer w20: U1.5@738.12,390.4 790.4,390.4 811,411 v3(811,452)
  Bottom Layer w20: R3.2 752.26,389.59 789.32,389.59 811,411.27 v3(811,452)
NetR4_2: R4.2 U2.3 | length 327.4
  Top Layer w12: U2.3@623.74,522.6 666.6,522.6 705,561 v3(840,561)
  Bottom Layer w12: R4.2 829.66,520.66 840,531 v3(840,561)
PH0: J11.8 J18.3 J23.2 | length 2094.8
  GND w20: J11.8 891.03,1666 753,1804.03 753,2257 840,2344 1404,2344 ; J18.3 1404,2344 ; J23.2 1878,2147 1681,2344 1404,2344
PH1: J11.5 J22.3 | length 1246
  GND w20: J11.5 946.71,1612.29 982.71,1612.29 992.97,1602.03 1003,1592 1003,1414 1061,1356 1895,1356 J22.3
RE0: J13.1 J13.4 J13.6 J16.2 J17.2 J18.2 J23.5 | length 3597.2
  GND w20: J17.2 J17.2@735.7,2464.3 ; J13.6@1061.29,1619.71 J13.6
  POWER w20: J16.2 625,1923 675,1873 894,1873 983,1784 983,1698 J13.6 J13.4 J13.1 ; J17.2 804,2546 1429,2546 J18.2 1804,2171 1804,1848 ; J13.1@1115.27,1516 1722,1516 1804,1598 1804,1848 ; J23.5 1805,1847 1804,1848
  Bottom Layer w20: J18.2 J18.2@1506.66,2468.34
SCL: J5.1 J6.2 | length 1591.5
  Top Layer w12: v1(1408,1262) 1408,291 1453,246 J5.1
  Bottom Layer w12: J6.2 1050,1252 1079,1281 1387.4,1281 1406.4,1262 v1(1408,1262)
SDA: J5.2 J6.4 | length 1506.3
  Top Layer w12: v1(1447,1124) 1447,335 1472,310 1574,310 J5.2
  Bottom Layer w12: J6.4 1100,1224 1126,1250 1344,1250 1447,1147 v1(1447,1124)
SPI_Board_CLK: J6.5 J9.1 | length 1198
  GND w12: J6.5@1150,1106.16 1150,1066 1216,1000 1332,1000 1440,892 1440,157 J9.1
SPI_Board_CS: J6.6 J9.4 | length 1628
  GND w12: v1(1365.86,1143.86) 1480.71,1029 1649,1029 1783,895 J9.4
  Bottom Layer w12: J6.6 1150,1212.28 1161.72,1224 1317,1224 1365.86,1175.14 v1(1365.86,1143.86)
  Bottom Layer w20: v1(1365.86,1143.86) v1@1365.86,1144.12
SPI_Board_MISO: J6.7 J9.2 | length 1221.2
  GND w12: J6.7 1200,1073.81 1246.81,1027 1361,1027 1473,915 1473,221.2 J9.2@1580.2,114
  GND w20: J9.2@1580.2,114 J9.2
SPI_Board_MOSI: J6.9 J9.3 | length 1293
  GND w12: J6.9 1250.15,1107.85 1250.15,1078.85 1274,1055 1399,1055 1541,913 1541,732 1514,705 1514,589 1712,391 1712,143 J9.3
SWCLK: J7.03 J8.5 | length 980.3
  Top Layer w12: v1(1755,451) J7.03@1836.98,451
  GND w12: v1(1603,787) 1620,770 1620,586 v1(1755,451)
  Bottom Layer w12: J8.5 1262,787 v1(1603,787)
SWDIO: J7.01 J8.6 | length 1107.8
  Top Layer w12: v1(1754,401) J7.01@1836.98,401
  GND w12: v1(1574,818) 1574,581 v1(1754,401)
  Bottom Layer w12: J8.6 1203,1002 1409,1002 1574,837 v1(1574,818)
SWO: J7.05 J8.3 | length 1016.7
  Top Layer w12: v1(1694,759) 1695.53,757.47 1704.53,757.47 1731,731 1731,535 1764.98,501.02 J7.05@1836.96,501.02
  Bottom Layer w12: J8.3 1240,759 v1(1694,759)
USB_+5V: C12.2 D1.1 D2.2 J3.2 J8.9 L1.2 M2.1 R5.2 U1.4 | length 1788.8
  Top Layer w20: M2.1 340.28,302.72 v3(339,304) 311,332 311,443 354,486 406,486 439.34,519.34 D1.1 492,585 v3(493,584)
  Top Layer w30: U1.4@738.12,315.6 861.6,315.6 v2(876,330)
  POWER w15: v3(339,304) 351,292 838,292 v2(876,330)
  POWER w40: v2@1070.91,588 1106,588 1250,732 J8.9
  Bottom Layer w20: D2.2 493,705.82 v3(493,584)
  other v2: 1070.91,587.91 1002.91,588.91
USB_N: J1.2 J6.1 | length 1154.8
  Top Layer w12: v6(858.13,783.87) 858.13,954.13 943,1039 1019,1039 1050,1070 J6.1 ; J1.2 v7(1095,246)
  POWER w12: v6(858.13,783.87) 923,719 923,437 1095,265 v7(1095,246)
  Bottom Layer w20: J6.1@1040.31,1098.31 J6.1
USB_P: J1.3 J6.3 | length 1179.3
  Top Layer w12: v6(883,810) 883,940 953,1010 1067,1010 1100,1043 J6.3 ; J1.3 v7(1120.59,246)
  Top Layer w20: J6.3@1096.29,1104.29 J6.3
  POWER w12: v6(883,810) 950,743 950,447 1119.83,277.17 1119.83,246.77 v7(1120.59,246)
VBAT_JST1: C2.2 J2.3 J8.10 M1.1 R1.2 TP1.1 U2.4 | length 4565.5
  Top Layer w15: v3(738,458) 738,522.34 U2.4@738.26,522.6
  Top Layer w40: J2.3 120.57,441.69 120.57,401.43 TP1.1
  GND w40: v5(902,164) 902,237 955,290 v5(1347,290)
  POWER w40: TP1.1 472,50 790,50 902,162 v5(902,164) ; J8.10 1250,981 1278,1009 1353,1009 1432,930 1432,364.43 1357.57,290 v5(1347,290)
  Bottom Layer w15: J2.3 52,510.26 52,750 98.28,796.28 M1.1 ; 232.26,442.26 282.52,392 488,392 525,429 709,429 v3(738,458)
  Bottom Layer w20: R1.2 C2.2
  Bottom Layer w30: J2.3 232.26,442.26 262,472 262,648 303,689 303,856 499,1052 R1.2
VBAT_JST2: C1.2 J*.1 M1.3 | length 1342.1
  POWER w40: v2(77,903) 77,1399 270,1592 270,1712 312.74,1754.74 J*.1
  Bottom Layer w30: 196,874 224.4,845.6 M1.3 ; C1.2@276.3,1754.04 J*.1@380.3,1754.04
  Bottom Layer w40: v2(77,903) 106,874 196,874
VBUS_PCB: C14.2 J8.8 R14.2 S1.2 U2.1 | length 2415.8
  Top Layer w20: 620,624 620,597.56 620.16,597.4 U2.1@623.74,597.4
  Top Layer w25: 620,624 v2(620,727)
  POWER w40: 920,1027 1162,1027 1198.69,990.32 1198.69,950.31 J8.8
  POWER w50: S1.2 769,1178 920,1027 v2(620,727)
  Bottom Layer w10: R14.2@1187.66,652 R14.2
  Bottom Layer w15: v2(620,727) 931,727 1005.66,652.34 R14.2
  Bottom Layer w25: C14.2 558.04,606.38 558.04,665.04 v2(620,727)
VDD: J7.02 J8.7 S2.1 | length 1268.2
  Top Layer w20: S2.1@1512,570 v1(1512,813)
  Top Layer w25: S2.1@1512,570 S2.1 1515,508 1539,484 1664,484 1704,444 1704,396 1759,341 1896.57,341 1956.57,401 J7.02@1997.02,401
  Bottom Layer w20: J8.7 1253,846 1496.29,846 1512,830.29 v1(1512,813)
WE1: J11.6 J17.3 J23.4 | length 2612.8
  GND w20: J17.3 629,2317 693,2253 693,1796 869.29,1619.71 889.29,1619.71 J11.6
  Bottom Layer w20: J17.3 683,2525 1108,2525 1332,2301 1686,2301 1856,2131 1856,2044 J23.4
WE2: J13.2 J17.1 J23.1 | length 2494.6
  Top Layer w20: J13.2 1019,1562 1019,1813 892,1940 777,1940 728,1989 728,2279 829,2380 J17.1 912,2554 1655,2554 1953,2256 J23.1
WE3: J11.4 J22.6 | length 1598.2
  Bottom Layer w20: J11.4 835,1566 777,1508 777,1387 839,1325 1626,1325 J22.6
WE4: J11.7 J19.2 J20.2 J22.2 | length 2476.6
  Top Layer w20: J19.2 J19.2@80,2058 ; J20.2@80,2194 J20.2 ; J11.7 J11.7@946.71,1669.71
  Bottom Layer w20: J20.2 80,2194 80,2058 J19.2 79,1998 223,1854 669,1854 735,1788 955,1788 996,1747 ; J20.2@95.5,2194.5 J20.2@96,2194 ; J11.7 946.71,1669.71 964.71,1669.71 996,1701 996,1747 ; J22.2 1854,1497 1552,1497 1261,1788 1037,1788 996,1747
pads on no net: J1.0 J1.4 J6.MH1 J6.MH2 J6.MH3 J6.MH4 J7. J7.07 J8.MH1 J8.MH2 J8.MH3 J8.MH4 J11.3 J11.MH1 J11.MH2 J11.MH3 J11.MH4 J13.MH1 J13.MH2 J13.MH3 J13.MH4 J18.1 S1.3 SC3.1 SC4.1

## Polygon pours and split planes (outlines as drawn)
GND on Top Layer "Top Layer-GND" (solid, remove dead copper, pour order 10): 12,13 1396.74,14.01 1396.74,689.01 571.74,689.01 571.74,1196.01 571.74,1297.01 571.74,1832.01 9.51,1832.01
USB_+5V on Top Layer "USB_+5V_L01_P003" (solid, remove dead copper, pour order 3): 1108,469 856,469 856,622 1108,622
USB_+5V on Bottom Layer "Bottom Layer-USB_+5V" (solid, remove dead copper, pour order 12): 800,291 1012,291 1012,533 1108,533 1108,622 856,622 856,461 800,405
NetC13_2 on POWER "POWER-NetC13_2" (solid, remove dead copper, pour order 7): 180,522 381,321 891,321 891,693 317,693 317,1079 136,1079 136,691 180,691
GND on GND "GND-GND" (solid, remove dead copper, pour order 9): 12.26,12.99 1397,14 1397,689 572,689 572,1196 1283,1196 1283,1297 572,1297 572,1640 380,1832 9.77,1832

## Keep-outs
Keep-Out Layer:
  lines w10: -0.1,1831.81 132.9,1831.81 ; 0,0 2100,0 2100,2600 0,2600 0,1833 ; 0,1 0.37,1595.14 ; 0,1598 133,1598 133,1831

## Other copper
Top Layer:
  pour cut-out: 163,1852 163,1573 0,1573 0,1852
GND:
  pour cut-out: 163,1852 163,1573 0,1573 0,1852
  pour cut-out: 817,13 817,367 1397,367 1397,14

## Silkscreen, mask and mechanical layers (free items; w line width, h text height)
Top Overlay:
  lines w10: 693,1049 723,1003 763,955 811,911 871,869 926,840 975,821 1036,805 1071,800 1095,797 1145,795 1192,798 1238,805 1282,817 ; 724,1002 696,1044 688,1058 679,1076 669,1095 663,1109 649,1149 642,1170 638,1187 633,1209 629,1226 626,1253 624.62,1263.97 624,1272 623,1293 623,1312 623,1323 624,1340 625,1355 626,1365 629,1385 632,1405 640,1439 644,1453 655,1488 669,1521 681,1545 699,1576 713,1598 729,1620 753,1649 782,1679 818,1710 835,1722 872,1747 897,1761 926,1775 947,1784 969,1792 995,1799 1022,1807 1039,1811 1059,1814 1083,1817 1109,1819 1139,1820 1161,1819 1200,1815 1229,1811 1261.9,1803.57 1279,1799 1296,1793 1329,1781 1364,1765 1417,1734 1444,1715 1465,1698 1482,1683 1504,1661 1527,1636 1548,1609 1574,1570 1583,1553 1596,1529 1600,1520 1600,1519 1600,1517 1600,1115 1600,1097 1599,1093 1586,1066 1573,1043 1556,1016 1541,996 1521,972 1497,946 1476,926 1458,911 1412,877 1370,853 1317,829 1277,816
  text "WE1" at 594,2353 h40
  text "RE0" at 698,2353 h40
  text "WE2" at 792,2353 h40
  text "PH0" at 1370,2353 h40
  text "RE0" at 1473,2353 h40
  text "CE0" at 496,2352 h40
  text "CE0" at 1268,2352 h40
  text "CE0_Echem" at 464,2270 h45
  text "CE0_BioZ" at 776,2270 h45
  text "AIN3" at 1485,2270 h45
  text "WE4 LEFT" at 36,2269 h45
  text "WE2" at 1730.16,2233.93 h45
  text "PH0" at 1741.56,2136.93 h45
  text "CE0" at 1740.44,2033.93 h45
  text "AIN1" at 1479,1954 h45
  text "RE0" at 539,1951 h45
  text "AIN2" at 822,1950 h45
  text "WE4 RIGHT" at 19,1944 h45
  text "WE1" at 1735.44,1934 h45
  text "RE0" at 1741.6,1830.93 h45
  text "AIN1" at 1732.7,1730.93 h45
  text "AIN3" at 1727.12,1630.93 h45
  text "VBAT_AUX" at 209,1525 h60
  text "AIN2" at 1727.41,1484.93 h45
  text "WE4" at 1729.99,1387.93 h45
  text "PH1" at 1747.05,1284.93 h45
  text "OFF" at 423,1258 h80 r90
  text "IONTOPH_E2" at 1607,1185 h40
  text "IONTOPH_E1" at 1609,1082 h40
  text "WE3" at 1729.87,981.93 h45
  text "ON" at 410,879 h80 r90
  text "GND" at 1730,870 h45
  text "SWD Header" at 1726,748 h40 r270
  text "B-C / VBAT_AUX" at 20.94,691.34 h60
  text "USER" at 1537,641 h40
  text "CHARGING" at 263,488 h60
  text "A      B      C" at 51,427 h40 r90
  text "RX TX" at 1309,330 h60
  text "A-B / VBAT_COIN" at 19.18,260 h60
  text "SCL SDA" at 1239,243 h60
  text "GND" at 553.18,25 h60
  text "MISO" at 1542,18 h40
  text "MOSI" at 1646,18 h40
  text "CS" at 1761,18 h40
  text "VBAT_COIN" at 223.18,17 h60
  text "SCK" at 1447,17 h40
Bottom Overlay:
  text "WE2" at 1815.05,2233.93 h45
  text "PH0" at 1815.05,2136.93 h45
  text "CE0" at 1815.05,2033.93 h45
  text "WE1" at 1815.05,1934 h45
  text "RE0" at 1815.05,1830.93 h45
  text "AIN1" at 1815.05,1730.93 h45
  text "AIN3" at 1815.05,1630.93 h45
  text "AIN2" at 1815.05,1484.93 h45
  text "WE4" at 1815.05,1387.93 h45
  text "PH1" at 1815.05,1284.93 h45
  text "Biocoin Motherboard / JB, TH, UCSD BioEE / Rev 1.0" at 1450,1236 h70
  text "IONTOPH_E2" at 1815.05,1185 h40
  text "IONTOPH_E1" at 1815.05,1082 h40
  text "WE3" at 1815.05,981.93 h45
  text "GND" at 1815.05,870 h45

## Text inside footprints (layer, text, board x,y; h text height)
J3: Top Overlay "*" at 881,364.5 h19.68 r90; Mechanical 13 "*" at 937,390 h50 r90
U2: Top Overlay "*" at 601.24,612.09 h50; Mechanical 13 "*" at 645.04,569.09 h50